# Altium PCB board.PcbDoc
Units mm, origin at the board's own origin, x right, y up, seen from the top; angles counter-clockwise.
Board outline 32 x 67 mm, 2 copper layers (Top Layer, Bottom Layer); 64 components, 72 nets, 272 pads, 0 vias.
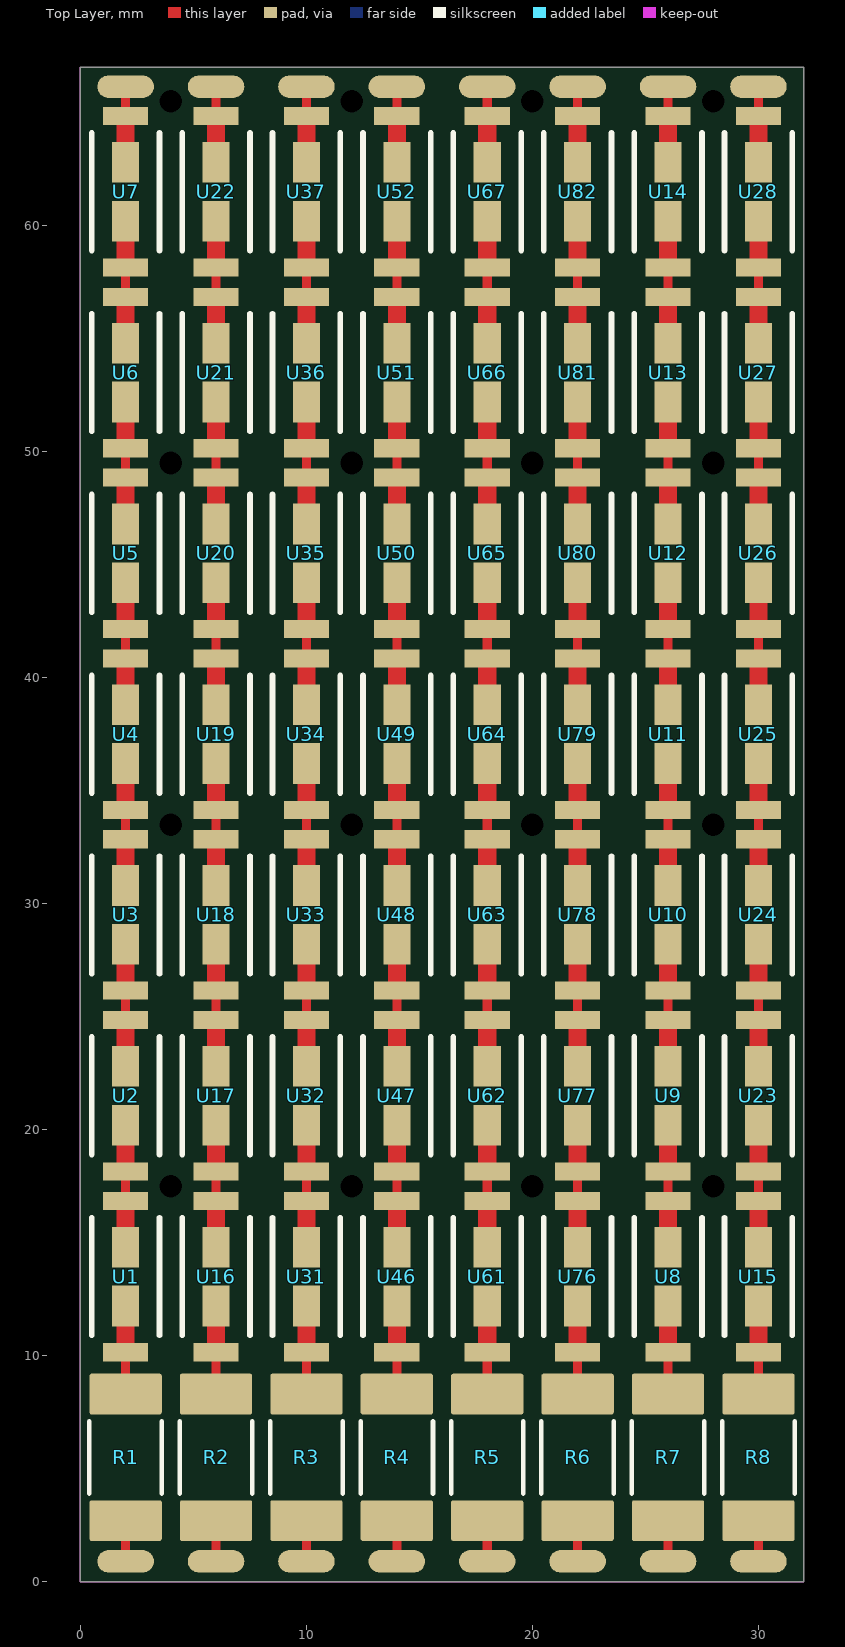
[diagram p0: Top Layer view]
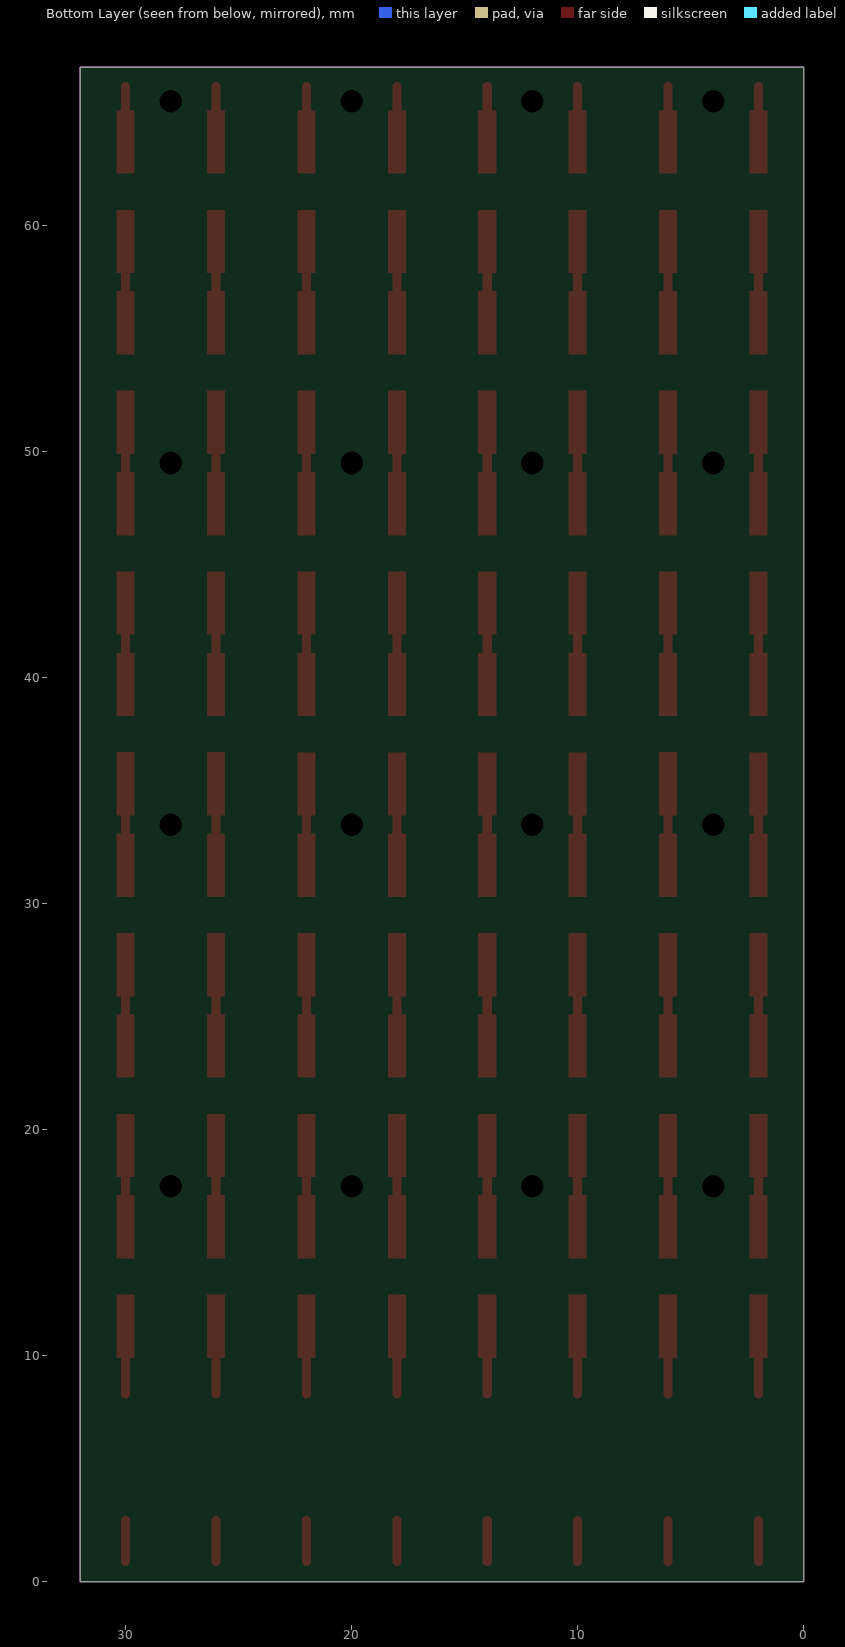
[diagram p1: Bottom Layer view, seen from below]

## Layer stack, top to bottom
Top Solder: solder mask 0.0102, Solder Resist, Dk 3.5
Top Layer: signal copper 0.0356
Dielectric 1: dielectric 0.32, FR-4, Dk 4.8
Bottom Layer: signal copper 0.0356
Bottom Solder: solder mask 0.0102, Solder Resist, Dk 3.5

## Board outline
0,0 0,67 32,67 32,0

## Design rules (kind name [scope] priority, off if disabled: settings)
AcuteAngle [All] p1: minimum=6.00000000000000E+0001 checktracksonly=FALSE
Clearance [All] p1: gap=0.18 ignorepadtopadclearanceinfootprint=FALSE except(0.3: Arc-Fill Arc-Poly Arc-Region Track-Fill Track-Poly Track-Region SMDPad-Fill SMDPad-Poly SMDPad-Region THPad-Fill THPad-Poly THPad-Region Via-Fill Via-Poly Via-Region Fill-Fill Fill-Poly Fill-Region Poly-Poly Poly-Region Region-Region)
ComponentClearance ComponentClearance_1 [HasFootprint('TP2030_SMD')] p1: gap=-1 collisioncheckmode=3 verticalgap=2540 showdistances=FALSE
ComponentClearance [All] p2: gap=0.254 collisioncheckmode=3 verticalgap=0.254 showdistances=FALSE
HoleSize [All] p1: absolutevalues=TRUE maxlimit=5 minlimit=1 maxpercent=80.000 minpercent=20.000
MinimumSolderMaskSliver [All] p1 off: minsoldermaskwidth=0.254
PermittedLayers [All] p1: toplayerpermitted=TRUE bottomlayerpermitted=FALSE
PlaneConnect [All] p1: planeconnectstyle=Direct reliefexpansion=0.508 reliefentries=4 reliefconductorwidth=0.254 reliefairgap=0.254
PolygonConnect [All] p1: connectstyle=Direct reliefconductorwidth=0.254 reliefentries=4 polygonreliefangle="90 Angle" airgapwidth=0.254
RoutingLayers [All] p1: top layer_v5=TRUE bottom layer_v5=FALSE
RoutingVias [All] p1: holewidth=0.711 width=1.27 viastyle="Through Hole" minholewidth=0.711 minwidth=1.27 maxholewidth=0.711 maxwidth=1.27
SilkToSolderMaskClearance [IsPad] p1 off: minsilkscreentomaskgap=0.254 clearancetoexposedcopper=TRUE
SolderMaskExpansion [All] p1: expansion=0.102 istentingtop=FALSE
UnRoutedNet [All] p1: checkbadconnections=TRUE
Width [All] p1: maxlimit=50 minlimit=0.2 preferedwidth=0.254
23 further rules are at their usual default settings.

## Classes and differential pairs
net class U28_Nets: K7 NetU27_2
net class U27_Nets: NetU26_2 NetU27_2
net class U26_Nets: NetU25_2 NetU26_2
net class U25_Nets: NetU24_2 NetU25_2
net class U24_Nets: NetU23_2 NetU24_2
net class U23_Nets: NetU15_2 NetU23_2
net class U15_Nets: NetR8_2 NetU15_2
net class R8_Nets: A7 NetR8_2
net class U14_Nets: K6 NetU13_2
net class U13_Nets: NetU12_2 NetU13_2
net class U12_Nets: NetU11_2 NetU12_2
net class U11_Nets: NetU10_2 NetU11_2
net class U10_Nets: NetU9_2 NetU10_2
net class U9_Nets: NetU8_2 NetU9_2
net class U8_Nets: NetR7_2 NetU8_2
net class R7_Nets: A6 NetR7_2
net class U82_Nets: K5 NetU81_2
net class U81_Nets: NetU80_2 NetU81_2
net class U80_Nets: NetU79_2 NetU80_2
net class U79_Nets: NetU78_2 NetU79_2
net class U78_Nets: NetU77_2 NetU78_2
net class U77_Nets: NetU76_2 NetU77_2
net class U76_Nets: NetR6_2 NetU76_2
net class R6_Nets: A5 NetR6_2
net class U67_Nets: K4 NetU66_2
net class U66_Nets: NetU65_2 NetU66_2
net class U65_Nets: NetU64_2 NetU65_2
net class U64_Nets: NetU63_2 NetU64_2
net class U63_Nets: NetU62_2 NetU63_2
net class U62_Nets: NetU61_2 NetU62_2
net class U61_Nets: NetR5_2 NetU61_2
net class R5_Nets: A4 NetR5_1 NetR5_2
net class U52_Nets: K3 NetU51_2
net class U51_Nets: NetU50_2 NetU51_2
net class U50_Nets: NetU49_2 NetU50_2
net class U49_Nets: NetU48_2 NetU49_2
net class U48_Nets: NetU47_2 NetU48_2
net class U47_Nets: NetU46_2 NetU47_2
net class U46_Nets: NetR4_2 NetU46_2
net class R4_Nets: A3 NetR4_1 NetR4_2
net class U37_Nets: K2 NetU36_2
net class U36_Nets: NetU35_2 NetU36_2
net class U35_Nets: NetU34_2 NetU35_2
net class U34_Nets: NetU33_2 NetU34_2
net class U33_Nets: NetU32_2 NetU33_2
net class U32_Nets: NetU31_2 NetU32_2
net class U31_Nets: NetR3_2 NetU31_2
net class R3_Nets: A2 NetR3_1 NetR3_2
net class U22_Nets: K1 NetU21_2
net class U21_Nets: NetU20_2 NetU21_2
net class U20_Nets: NetU19_2 NetU20_2
net class U19_Nets: NetU18_2 NetU19_2
net class U18_Nets: NetU17_2 NetU18_2
net class U17_Nets: NetU16_2 NetU17_2
net class U16_Nets: NetR2_2 NetU16_2
net class R2_Nets: A1 NetR2_1 NetR2_2
net class U7_Nets: K0 NetU6_2
net class U6_Nets: NetU5_2 NetU6_2
net class U5_Nets: NetU4_2 NetU5_2
net class U4_Nets: NetU3_2 NetU4_2
net class U3_Nets: NetU2_2 NetU3_2
net class U2_Nets: NetU1_2 NetU2_2
net class U1_Nets: NetR1_2 NetU1_2
net class R1_Nets: A0 NetR1_1 NetR1_2

## Components (designator, comment, footprint, x,y, rotation, side; value= is the part's Value field where it differs from the comment)
R1 "10" R2512 2,5.5 r90 top
R2 "10" R2512 6,5.5 r90 top
R3 "10" R2512 10,5.5 r90 top
R4 "10" R2512 14,5.5 r90 top
R5 "10" R2512 18,5.5 r90 top
R6 "10" R2512 22,5.5 r90 top
R7 "10" R2512 26,5.5 r90 top
R8 "10" R2512 30,5.5 r90 top
U1 "" LED-SMD_7030 2,13.5 r90 top
U2 "" LED-SMD_7030 2,21.5 r90 top
U3 "" LED-SMD_7030 2,29.5 r90 top
U4 "" LED-SMD_7030 2,37.5 r90 top
U5 "" LED-SMD_7030 2,45.5 r90 top
U6 "" LED-SMD_7030 2,53.5 r90 top
U7 "" LED-SMD_7030 2,61.5 r90 top
U8 "" LED-SMD_7030 26,13.5 r90 top
U9 "" LED-SMD_7030 26,21.5 r90 top
U10 "" LED-SMD_7030 26,29.5 r90 top
U11 "" LED-SMD_7030 26,37.5 r90 top
U12 "" LED-SMD_7030 26,45.5 r90 top
U13 "" LED-SMD_7030 26,53.5 r90 top
U14 "" LED-SMD_7030 26,61.5 r90 top
U15 "" LED-SMD_7030 30,13.5 r90 top
U16 "" LED-SMD_7030 6,13.5 r90 top
U17 "" LED-SMD_7030 6,21.5 r90 top
U18 "" LED-SMD_7030 6,29.5 r90 top
U19 "" LED-SMD_7030 6,37.5 r90 top
U20 "" LED-SMD_7030 6,45.5 r90 top
U21 "" LED-SMD_7030 6,53.5 r90 top
U22 "" LED-SMD_7030 6,61.5 r90 top
U23 "" LED-SMD_7030 30,21.5 r90 top
U24 "" LED-SMD_7030 30,29.5 r90 top
U25 "" LED-SMD_7030 30,37.5 r90 top
U26 "" LED-SMD_7030 30,45.5 r90 top
U27 "" LED-SMD_7030 30,53.5 r90 top
U28 "" LED-SMD_7030 30,61.5 r90 top
U31 "" LED-SMD_7030 10,13.5 r90 top
U32 "" LED-SMD_7030 10,21.5 r90 top
U33 "" LED-SMD_7030 10,29.5 r90 top
U34 "" LED-SMD_7030 10,37.5 r90 top
U35 "" LED-SMD_7030 10,45.5 r90 top
U36 "" LED-SMD_7030 10,53.5 r90 top
U37 "" LED-SMD_7030 10,61.5 r90 top
U46 "" LED-SMD_7030 14,13.5 r90 top
U47 "" LED-SMD_7030 14,21.5 r90 top
U48 "" LED-SMD_7030 14,29.5 r90 top
U49 "" LED-SMD_7030 14,37.5 r90 top
U50 "" LED-SMD_7030 14,45.5 r90 top
U51 "" LED-SMD_7030 14,53.5 r90 top
U52 "" LED-SMD_7030 14,61.5 r90 top
U61 "" LED-SMD_7030 18,13.5 r90 top
U62 "" LED-SMD_7030 18,21.5 r90 top
U63 "" LED-SMD_7030 18,29.5 r90 top
U64 "" LED-SMD_7030 18,37.5 r90 top
U65 "" LED-SMD_7030 18,45.5 r90 top
U66 "" LED-SMD_7030 18,53.5 r90 top
U67 "" LED-SMD_7030 18,61.5 r90 top
U76 "" LED-SMD_7030 22,13.5 r90 top
U77 "" LED-SMD_7030 22,21.5 r90 top
U78 "" LED-SMD_7030 22,29.5 r90 top
U79 "" LED-SMD_7030 22,37.5 r90 top
U80 "" LED-SMD_7030 22,45.5 r90 top
U81 "" LED-SMD_7030 22,53.5 r90 top
U82 "" LED-SMD_7030 22,61.5 r90 top

## Footprints (in the part's own frame and the unit in brackets; to place one, negate y for a bottom-side part, rotate by r counter-clockwise, add the part's x,y. Pads: shape width x height; smd on the part's side, far side on the other; paste and mask are expansions set on the pad)
LED-SMD_7030 [mm]
  rect 0.8x2 smd: 1(-3.35,0) 2(3.35,0)
  rect 1.8x1.2 smd mask+0.102: 1(-1.3,0) 2(1.3,0)
  Top Layer region: 0.8,-0.4 3.6,-0.4 3.6,0.4 0.8,0.4
  Top Layer region: -0.8,0.4 -3.6,0.4 -3.6,-0.4 -0.8,-0.4
  silkscreen extent -2.6,-1.5 2.6,1.5, body extent -3.5,-1.5 3.5,1.5, height 0.7
R2512 [mm] "Chip Resistor; Body 6.4 x 3.2 mm (LxW typ)"
  rrect10% 1.8x3.2 smd mask+0.05: 1(-2.8,0) 2(2.8,0)
  silkscreen extent -1.6,-1.6 1.6,1.6, body extent -3.19,-1.55 3.16,1.55, height 0.55

## Part data
R1 R2 R3 R4 R5 R6 R7 R8: library part RES, "10R 2512", LCSC part number=C173291, P/N=RC2512JK-7W10RL
U1 U2 U3 U4 U5 U6 U7 U8 U9 U10 U11 U12 U13 U14 U15 U16 U17 U18 U19 U20 U21 U22 U23 U24 U25 U26 U27 U28 U31 U32 U33 U34 U35 U36 U37 U46 U47 U48 U49 U50 U51 U52 U61 U62 U63 U64 U65 U66 U67 U76 U77 U78 U79 U80 U81 U82: library part XL-C3570P8S11-62C3C2

## Free pads (board coordinates)
  oval 2.5x1 smd: +(2,0.9) +(2,66.15) +(6,0.9) +(6,66.15) +(10,0.9) +(10,66.15) +(14,0.9) +(14,66.15) +(18,0.9) +(18,66.15) +(22,0.9) +(22,66.15) +(26,0.9) +(26,66.15) +(30,0.9) +(30,66.15)
  round 0 hole 1: +1(4,33.5) +1(4,49.5) +1(4,65.5) +1(4,17.5) +1(12,33.5) +1(12,49.5) +1(12,65.5) +1(12,17.5) +1(20,33.5) +1(20,49.5) +1(20,65.5) +1(20,17.5) +1(28,33.5) +1(28,49.5) +1(28,65.5) +1(28,17.5)

## Nets (pads, with @x,y where several pads share a name; then routed paths per layer and width w, separated by ;. In a path a pad name is that pad's centre, name@x,y a point inside that pad or via, vN(x,y) a via of type N, cw(c..) or ccw(c..) an arc to the next point about the centre after c; other vN are vias at no path point)
A0: pad.+@2,0.9 R1.1 | length 1.8
  Top Layer w0.4: pad.+@2,0.9 R1.1@2,2.7
A1: pad.+@6,0.9 R2.1 | length 1.8
  Top Layer w0.4: pad.+@6,0.9 R2.1
A2: pad.+@10,0.9 R3.1 | length 1.8
  Top Layer w0.4: pad.+@10,0.9 R3.1
A3: pad.+@14,0.9 R4.1 | length 1.8
  Top Layer w0.4: pad.+@14,0.9 R4.1
A4: pad.+@18,0.9 R5.1 | length 1.8
  Top Layer w0.4: pad.+@18,0.9 R5.1
A5: pad.+@22,0.9 R6.1 | length 1.8
  Top Layer w0.4: pad.+@22,0.9 R6.1
A6: pad.+@26,0.9 R7.1 | length 1.8
  Top Layer w0.4: pad.+@26,0.9 R7.1
A7: pad.+@30,0.9 R8.1 | length 1.8
  Top Layer w0.4: pad.+@30,0.9 R8.1
K0: pad.+@2,66.15 U7.2 | length 1.3
  Top Layer w0.4: U7.2@2,64.85 pad.+@2,66.15
K1: pad.+@6,66.15 U22.2 | length 1.3
  Top Layer w0.4: U22.2@6,64.85 pad.+@6,66.15
K2: pad.+@10,66.15 U37.2 | length 1.3
  Top Layer w0.4: U37.2@10,64.85 pad.+@10,66.15
K3: pad.+@14,66.15 U52.2 | length 1.3
  Top Layer w0.4: U52.2@14,64.85 pad.+@14,66.15
K4: pad.+@18,66.15 U67.2 | length 1.3
  Top Layer w0.4: U67.2@18,64.85 pad.+@18,66.15
K5: pad.+@22,66.15 U82.2 | length 1.3
  Top Layer w0.4: U82.2@22,64.85 pad.+@22,66.15
K6: pad.+@26,66.15 U14.2 | length 1.3
  Top Layer w0.4: U14.2@26,64.85 pad.+@26,66.15
K7: pad.+@30,66.15 U28.2 | length 1.3
  Top Layer w0.4: U28.2@30,64.85 pad.+@30,66.15
NetR1_2: R1.2 U1.1 | length 1.9
  Top Layer w0.4: R1.2 U1.1@2,10.15
NetR2_2: R2.2 U16.1 | length 1.9
  Top Layer w0.4: R2.2 U16.1@6,10.15
NetR3_2: R3.2 U31.1 | length 1.9
  Top Layer w0.4: R3.2 U31.1@10,10.15
NetR4_2: R4.2 U46.1 | length 1.9
  Top Layer w0.4: R4.2 U46.1@14,10.15
NetR5_2: R5.2 U61.1 | length 1.9
  Top Layer w0.4: R5.2 U61.1@18,10.15
NetR6_2: R6.2 U76.1 | length 1.9
  Top Layer w0.4: R6.2 U76.1@22,10.15
NetR7_2: R7.2 U8.1 | length 1.9
  Top Layer w0.4: R7.2 U8.1@26,10.15
NetR8_2: R8.2 U15.1 | length 1.9
  Top Layer w0.4: R8.2 U15.1@30,10.15
NetU1_2: U1.2 U2.1 | length 1.3
  Top Layer w0.4: U1.2@2,16.85 U2.1@2,18.15
NetU2_2: U2.2 U3.1 | length 1.3
  Top Layer w0.4: U2.2@2,24.85 U3.1@2,26.15
NetU3_2: U3.2 U4.1 | length 1.3
  Top Layer w0.4: U3.2@2,32.85 U4.1@2,34.15
NetU4_2: U4.2 U5.1 | length 1.3
  Top Layer w0.4: U4.2@2,40.85 U5.1@2,42.15
NetU5_2: U5.2 U6.1 | length 1.3
  Top Layer w0.4: U5.2@2,48.85 U6.1@2,50.15
NetU6_2: U6.2 U7.1 | length 1.3
  Top Layer w0.4: U6.2@2,56.85 U7.1@2,58.15
NetU8_2: U8.2 U9.1 | length 1.3
  Top Layer w0.4: U8.2@26,16.85 U9.1@26,18.15
NetU9_2: U9.2 U10.1 | length 1.3
  Top Layer w0.4: U9.2@26,24.85 U10.1@26,26.15
NetU10_2: U10.2 U11.1 | length 1.3
  Top Layer w0.4: U10.2@26,32.85 U11.1@26,34.15
NetU11_2: U11.2 U12.1 | length 1.3
  Top Layer w0.4: U11.2@26,40.85 U12.1@26,42.15
NetU12_2: U12.2 U13.1 | length 1.3
  Top Layer w0.4: U12.2@26,48.85 U13.1@26,50.15
NetU13_2: U13.2 U14.1 | length 1.3
  Top Layer w0.4: U13.2@26,56.85 U14.1@26,58.15
NetU15_2: U15.2 U23.1 | length 1.3
  Top Layer w0.4: U15.2@30,16.85 U23.1@30,18.15
NetU16_2: U16.2 U17.1 | length 1.3
  Top Layer w0.4: U16.2@6,16.85 U17.1@6,18.15
NetU17_2: U17.2 U18.1 | length 1.3
  Top Layer w0.4: U17.2@6,24.85 U18.1@6,26.15
NetU18_2: U18.2 U19.1 | length 1.3
  Top Layer w0.4: U18.2@6,32.85 U19.1@6,34.15
NetU19_2: U19.2 U20.1 | length 1.3
  Top Layer w0.4: U19.2@6,40.85 U20.1@6,42.15
NetU20_2: U20.2 U21.1 | length 1.3
  Top Layer w0.4: U20.2@6,48.85 U21.1@6,50.15
NetU21_2: U21.2 U22.1 | length 1.3
  Top Layer w0.4: U21.2@6,56.85 U22.1@6,58.15
NetU23_2: U23.2 U24.1 | length 1.3
  Top Layer w0.4: U23.2@30,24.85 U24.1@30,26.15
NetU24_2: U24.2 U25.1 | length 1.3
  Top Layer w0.4: U24.2@30,32.85 U25.1@30,34.15
NetU25_2: U25.2 U26.1 | length 1.3
  Top Layer w0.4: U25.2@30,40.85 U26.1@30,42.15
NetU26_2: U26.2 U27.1 | length 1.3
  Top Layer w0.4: U26.2@30,48.85 U27.1@30,50.15
NetU27_2: U27.2 U28.1 | length 1.3
  Top Layer w0.4: U27.2@30,56.85 U28.1@30,58.15
NetU31_2: U31.2 U32.1 | length 1.3
  Top Layer w0.4: U31.2@10,16.85 U32.1@10,18.15
NetU32_2: U32.2 U33.1 | length 1.3
  Top Layer w0.4: U32.2@10,24.85 U33.1@10,26.15
NetU33_2: U33.2 U34.1 | length 1.3
  Top Layer w0.4: U33.2@10,32.85 U34.1@10,34.15
NetU34_2: U34.2 U35.1 | length 1.3
  Top Layer w0.4: U34.2@10,40.85 U35.1@10,42.15
NetU35_2: U35.2 U36.1 | length 1.3
  Top Layer w0.4: U35.2@10,48.85 U36.1@10,50.15
NetU36_2: U36.2 U37.1 | length 1.3
  Top Layer w0.4: U36.2@10,56.85 U37.1@10,58.15
NetU46_2: U46.2 U47.1 | length 1.3
  Top Layer w0.4: U46.2@14,16.85 U47.1@14,18.15
NetU47_2: U47.2 U48.1 | length 1.3
  Top Layer w0.4: U47.2@14,24.85 U48.1@14,26.15
NetU48_2: U48.2 U49.1 | length 1.3
  Top Layer w0.4: U48.2@14,32.85 U49.1@14,34.15
NetU49_2: U49.2 U50.1 | length 1.3
  Top Layer w0.4: U49.2@14,40.85 U50.1@14,42.15
NetU50_2: U50.2 U51.1 | length 1.3
  Top Layer w0.4: U50.2@14,48.85 U51.1@14,50.15
NetU51_2: U51.2 U52.1 | length 1.3
  Top Layer w0.4: U51.2@14,56.85 U52.1@14,58.15
NetU61_2: U61.2 U62.1 | length 1.3
  Top Layer w0.4: U61.2@18,16.85 U62.1@18,18.15
NetU62_2: U62.2 U63.1 | length 1.3
  Top Layer w0.4: U62.2@18,24.85 U63.1@18,26.15
NetU63_2: U63.2 U64.1 | length 1.3
  Top Layer w0.4: U63.2@18,32.85 U64.1@18,34.15
NetU64_2: U64.2 U65.1 | length 1.3
  Top Layer w0.4: U64.2@18,40.85 U65.1@18,42.15
NetU65_2: U65.2 U66.1 | length 1.3
  Top Layer w0.4: U65.2@18,48.85 U66.1@18,50.15
NetU66_2: U66.2 U67.1 | length 1.3
  Top Layer w0.4: U66.2@18,56.85 U67.1@18,58.15
NetU76_2: U76.2 U77.1 | length 1.3
  Top Layer w0.4: U76.2@22,16.85 U77.1@22,18.15
NetU77_2: U77.2 U78.1 | length 1.3
  Top Layer w0.4: U77.2@22,24.85 U78.1@22,26.15
NetU78_2: U78.2 U79.1 | length 1.3
  Top Layer w0.4: U78.2@22,32.85 U79.1@22,34.15
NetU79_2: U79.2 U80.1 | length 1.3
  Top Layer w0.4: U79.2@22,40.85 U80.1@22,42.15
NetU80_2: U80.2 U81.1 | length 1.3
  Top Layer w0.4: U80.2@22,48.85 U81.1@22,50.15
NetU81_2: U81.2 U82.1 | length 1.3
  Top Layer w0.4: U81.2@22,56.85 U82.1@22,58.15

## Keep-outs
Keep-Out Layer:
  the board outline again, w0